# Altium PCB FM_transmitter_rev2.PcbDoc
Units mil, origin at the board's own origin, x right, y up, seen from the top; angles counter-clockwise.
Board outline 2047.24 x 3110.24 mil, 2 copper layers (Top Layer, Bottom Layer); 45 components, 26 nets, 135 pads, 118 vias.
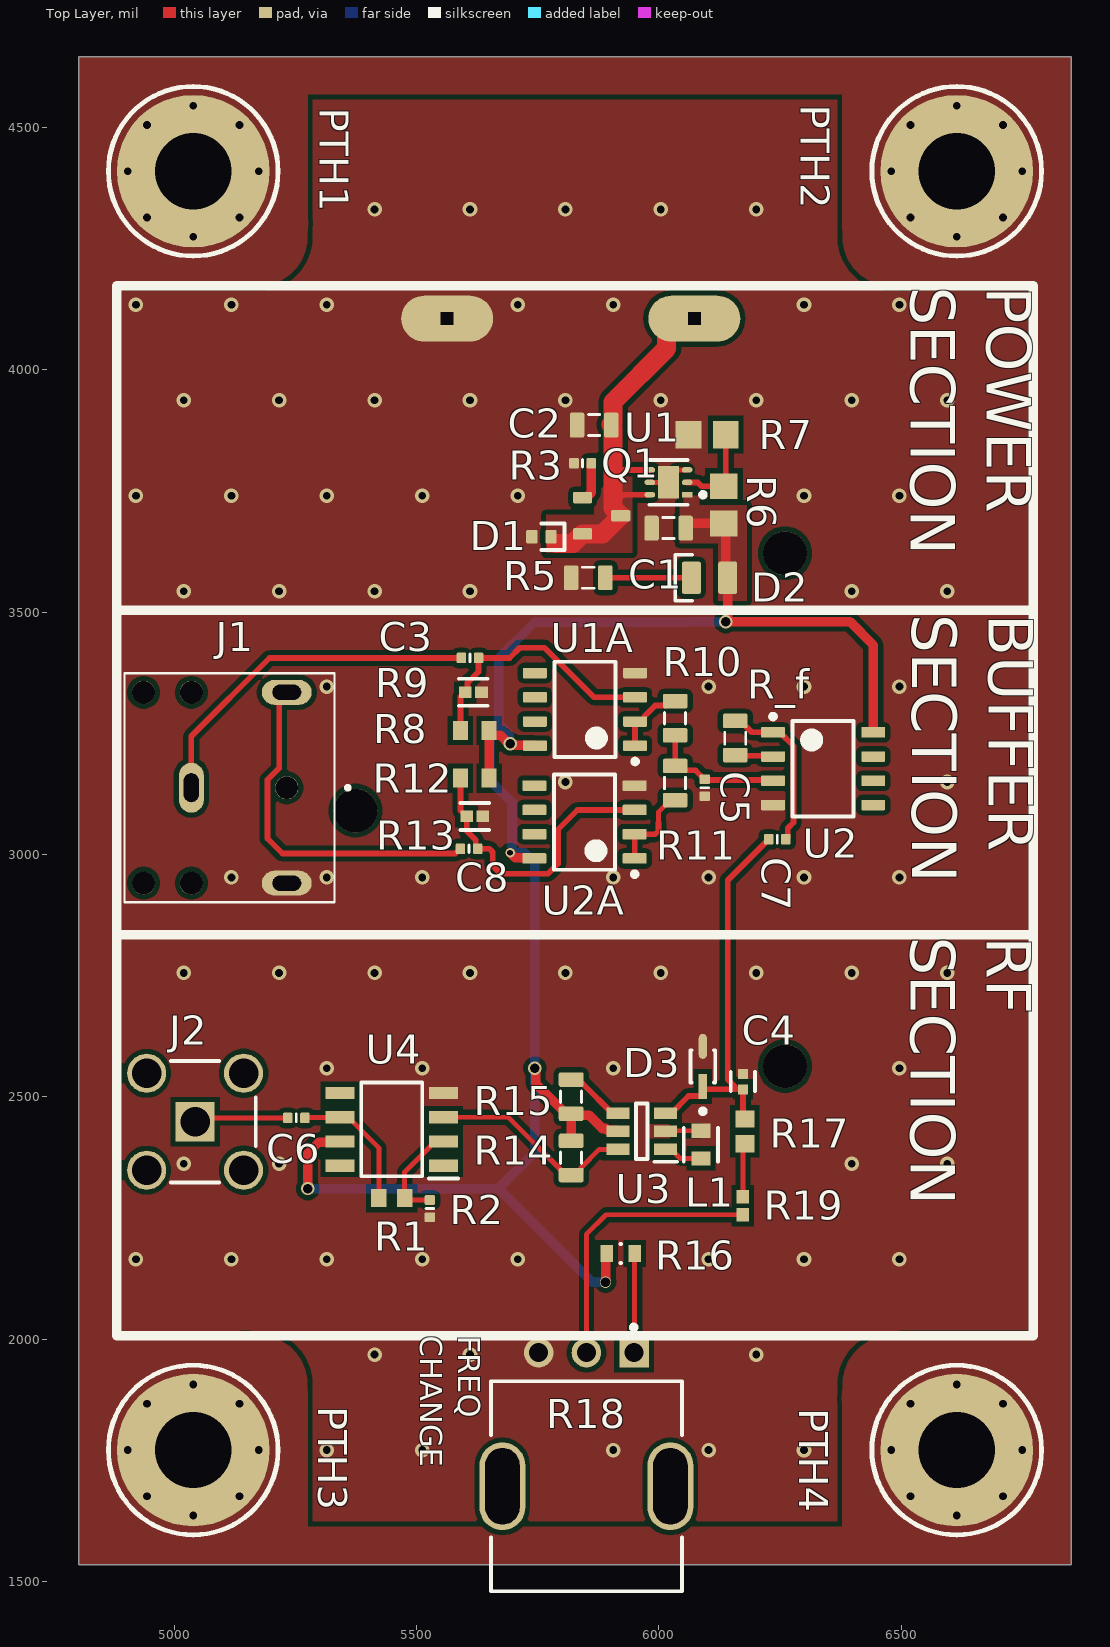
[diagram p0: Top Layer view]
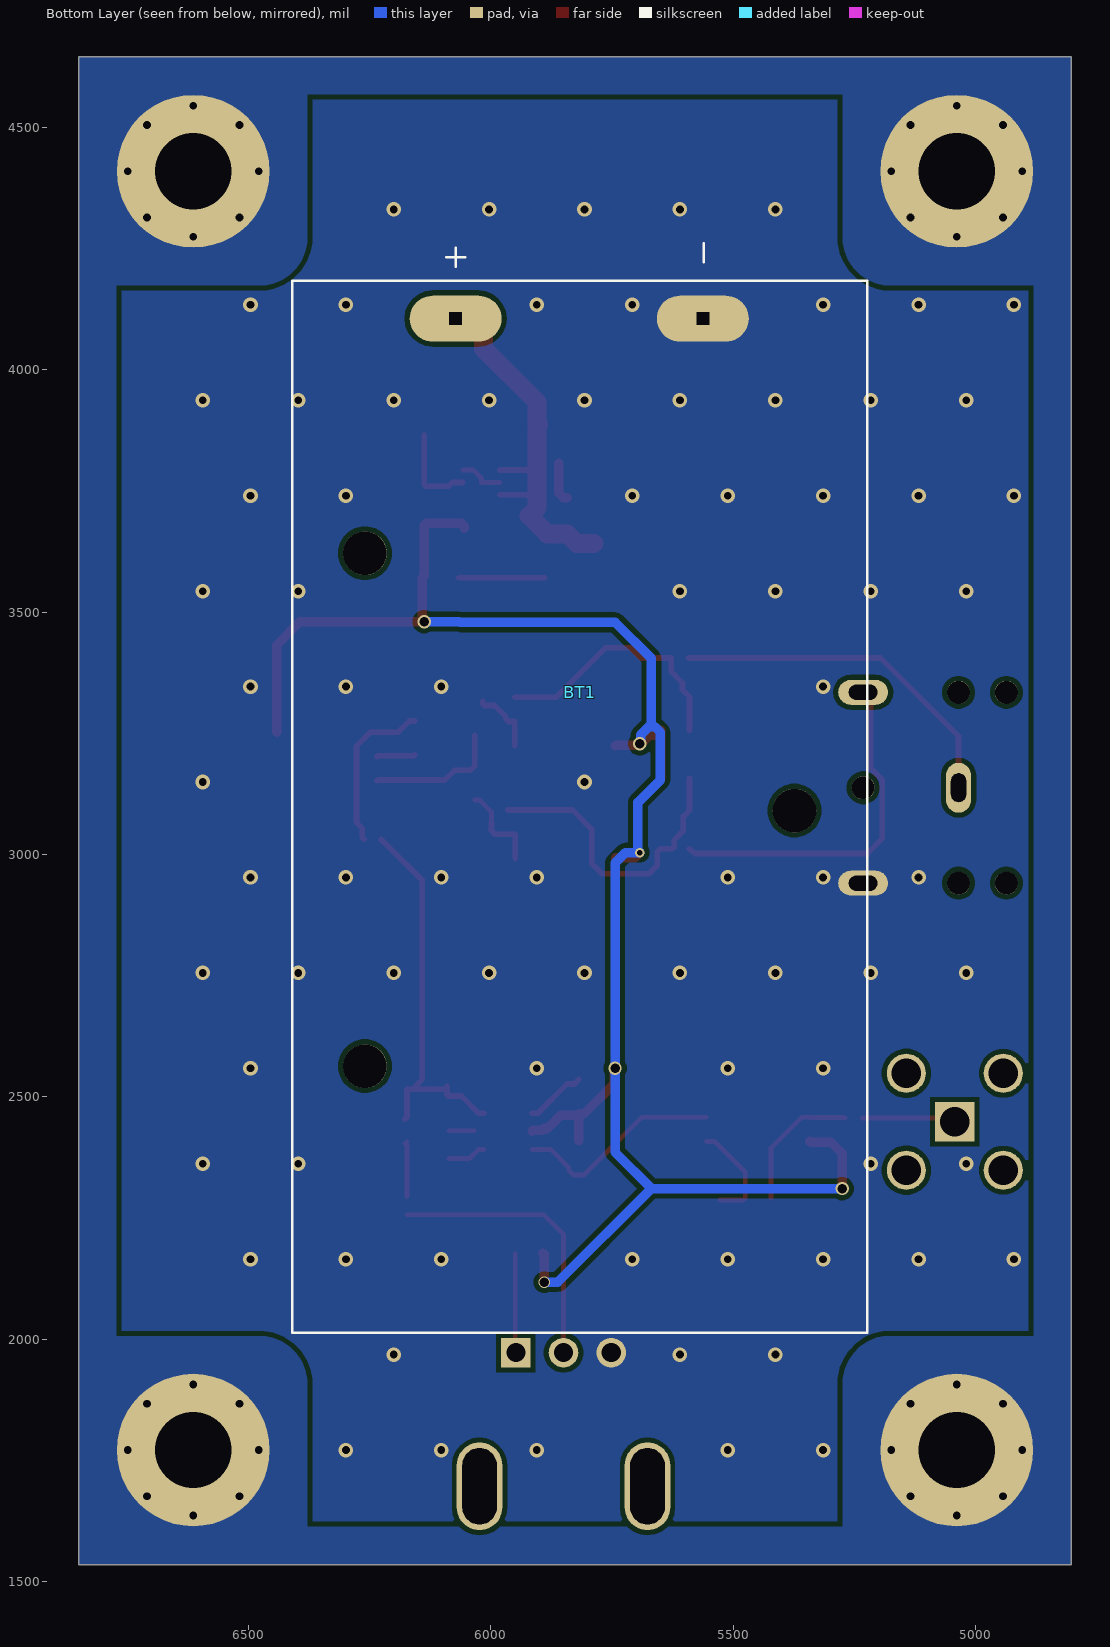
[diagram p1: Bottom Layer view, seen from below]
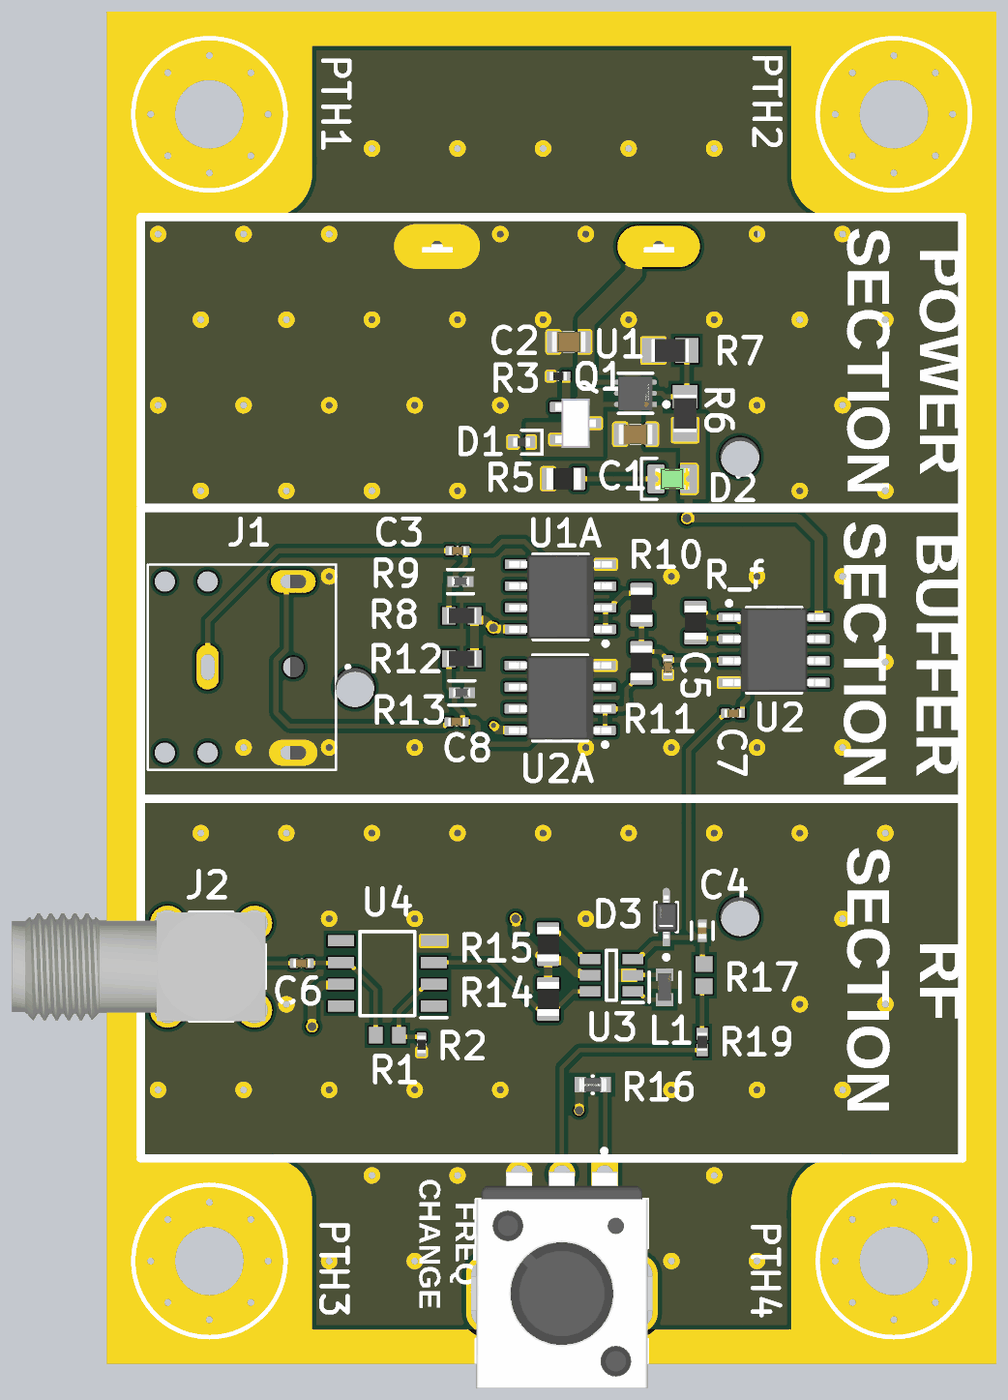
[diagram p2: 3D render of the assembled board from above, using the file's embedded part models]

## Layer stack, top to bottom
Top Solder: solder mask 0.4, Solder Resist, Dk 3.5
Top Layer: signal copper 1.4
Dielectric 1: dielectric 12.6, FR-4, Dk 4.8
Bottom Layer: signal copper 1.4
Bottom Solder: solder mask 0.4, Solder Resist, Dk 3.5

## Board outline
4803.15,1535.43 6850.39,1535.43 6850.39,4645.67 4803.15,4645.67

## Design rules (kind name [scope] priority, off if disabled: settings)
Clearance [All] p1: gap=10 ignorepadtopadclearanceinfootprint=FALSE ismatrix=TRUE
HoleSize MaxMinHoleSize_1 [All] p1: absolutevalues=TRUE maxlimit=100 minlimit=1 maxpercent=80.000 minpercent=20.000
HoleSize [All] p2: absolutevalues=TRUE maxlimit=100 minlimit=1 maxpercent=80.000 minpercent=20.000
PlaneConnect PowerPlaneConnectStyle_1 [All] p1: planeconnectstyle=Relief reliefexpansion=20 reliefentries=2 reliefconductorwidth=10 reliefairgap=10
PlaneConnect [All] p2: planeconnectstyle=Relief reliefexpansion=20 reliefentries=4 reliefconductorwidth=10 reliefairgap=10
PolygonConnect PolygonConnectStyle_1 [All] p1: connectstyle=Direct reliefconductorwidth=10 reliefentries=2 polygonreliefangle="45 Angle" airgapwidth=10
PolygonConnect [All] p2: connectstyle=Relief reliefconductorwidth=10 reliefentries=4 polygonreliefangle="90 Angle" airgapwidth=10
RoutingVias RoutingViaStyle_1 [All] p1: holewidth=10 width=11.81 viastyle="Through Hole" minholewidth=3.94 minwidth=3.94 maxholewidth=236.22 maxwidth=236.22
RoutingVias [All] p2: holewidth=28 width=50 viastyle="Through Hole" minholewidth=28 minwidth=50 maxholewidth=28 maxwidth=50
ShortCircuit ShortCircuit_1 [All] p1: allowed=FALSE
ShortCircuit [All] p2: allowed=FALSE
SolderMaskExpansion [All] p1: expansion=4 istentingtop=FALSE
Width MaxMinWidth_1 [All] p1: maxlimit=196.85 minlimit=10 preferedwidth=11.81 minimp=50.000000 maximp=50.000000 favimp=50.000000
Width [All] p2: maxlimit=10 minlimit=10 preferedwidth=10
27 further rules are at their usual default settings.

## Components (designator, comment, footprint, x,y, rotation, side; value= is the part's Value field where it differs from the comment)
BT1 "BC9VPC" BAT_BC9VPC 5818.02,3090.55 r90 bottom
C1 "Capacitor 100µF +/-20% 6.3V 0805" CAPC0805(2012)145_L 6019.68,3673.23 r180 top value=2u2
C2 "Capacitor 100µF +/-20% 6.3V 0805" CAPC0805(2012)145_L 5866.14,3885.83 r180 top value=2u2
C3 "Capacitor 2,2µF +/-20% 10V 0402" CAPC0402(1005)60_L 5610.24,3405.51 r0 top value=2.2µF
C4 "750pF" FP-C0402-BB-MFG 6173.23,2531.5 r90 top value="750 pF"
C5 "Capacitor 22nF +/-20% 10V 0402" CAPC0402(1005)60_L 6094.49,3137.8 r270 top value=22nF
C6 "Capacitor 2,2µF +/-20% 10V 0402" CAPC0402(1005)60_L 5251.97,2456.69 r180 top value=2.2µF
C7 "Capacitor 2,2µF +/-20% 10V 0402" CAPC0402(1005)60_L 6244.09,3031.5 r180 top value=2.2µF
C8 "Capacitor 2,2µF +/-20% 10V 0402" CAPC0402(1005)60_L 5608.27,3011.81 r0 top value=2.2µF
D1 "D_TVS_0402" D_0402 5757.68,3655.47 r0 top
D2 "GREEN" LED_0805_GREEN 6104.33,3570.87 r0 top
D3 "BZT52C2V4S-7-F" FP-SOD323-IPC_B 6090.55,2562.99 r90 top
J1 "SJ1-3523N" CUI_SJ1-3523N 5035.43,3137.8 r270 top
J2 "731000114" MOLX-731000114_V 5043.31,2448.82 r0 top
L1 "400nH" FP-LQW18CA_00-MFG 6086.61,2401.57 r90 top
PTH1 "Mounting Hole M4" "Mounting Hole M4" 5039.37,4409.45 r0 top
PTH2 "Mounting Hole M4" "Mounting Hole M4" 6614.17,4409.45 r0 top
PTH3 "Mounting Hole M4" "Mounting Hole M4" 5039.37,1771.65 r0 top
PTH4 "Mounting Hole M4" "Mounting Hole M4" 6614.17,1771.65 r0 top
Q1 "SSM3J338R,LF" SSM3J338R,LF-SOT23-F 5881.89,3698.82 r270 top
R1 "910R" RESC1608X55X30NL15T15 5448.82,2291.34 r180 top
R2 "100R2F" RESC0402(1005)_L 5527.56,2269.69 r90 top value=100R
R3 "10KR2F" RESC0402(1005)_L 5842.52,3807.09 r180 top value=10k
R5 "1KR5J" RESC0805(2012)_L 5854.33,3570.87 r0 top value=1k
R6 "Resistor 1k +/-1% 0805 125 mW" RESC2013X70X40ML20T20 6133.86,3721.46 r270 top
R7 "Resistor 1k +/-1% 0805 125 mW" RESC2013X70X40ML20T20 6099.41,3866.14 r0 top value=160k
R8 "Resistor 100k +/-1% 0603 100 mW" RESC1608X55X25ML10T15 5620.08,3255.91 r0 top value=100k
R9 "ERA-2AEB473X" FP-ERA2A-IPC_B 5617.18,3334.65 r180 top value=47k
R10 "1KR5J" RESC0805(2012)_L 6033.46,3281.1 r270 top value=1k
R11 "1KR5J" RESC0805(2012)_L 6033.46,3147.64 r90 top value=1k
R12 "Resistor 100k +/-1% 0603 100 mW" RESC1608X55X25ML10T15 5620.08,3157.48 r0 top value=100k
R13 "ERA-2AEB473X" FP-ERA2A-IPC_B 5620.08,3078.74 r180 top value=47k
R14 "1KR5J" RESC0805(2012)_L 5818.9,2374.41 r90 top value=1k
R15 "1KR5J" RESC0805(2012)_L 5818.9,2500.39 r270 top value=1k
R16 "14.7k" FP-ERA3A-MFG 5921.26,2177.17 r0 top value=14.7kΩ
R17 "2.7k" RESC1608X55X30NL20T20 6177.17,2429.13 r90 top
R18 "PTV09A-4225F-B103" FP-PTV09A-4-MFG 5850.39,1696.85 r180 top
R19 "Resistor 0R 0402 63 mW" RESC1005X40X25ML05T10 6173.23,2275.59 r90 top value=0
R_f "1KR5J" RESC0805(2012)_L 6157.48,3240.16 r270 top value=1k
U1 "TLV76701DRVR" FP-DRV0006A-IPC_C 6019.68,3767.72 r180 top
U1A "LM358DR" D0008A_L 5847.44,3299.41 r180 top
U2 "LM358DR" D0008A_L 6338.58,3177.17 r0 top
U2A "LM358DR" D0008A_L 5846.46,3066.93 r180 top
U3 "MAX2606EUT+T" SOT95P280X145-6N 5964.57,2429.13 r180 top
U4 "LMH6714MA_NOPB" SOIC127P600X175-8N 5448.82,2433.07 r180 top

## Footprints (in the part's own frame and the unit in brackets; to place one, negate y for a bottom-side part, rotate by r counter-clockwise, add the part's x,y. Pads: shape width x height; smd on the part's side, far side on the other; paste and mask are expansions set on the pad)
BAT_BC9VPC [mil]
  oval 94.88x189.76 hole 26 square: N(1015,-255) P(1015,255)
  round 90 hole 90 unplated: ""(-527,442) ""(0,-444) ""(531,442)
  silkscreen extent -1077,-594 1171,592, body extent -1085,-593 1085,593, height 845
CAPC0402(1005)60_L [mm] "Chip Capacitor, Body 1.0x0.5mm, Height 0.6mm, IPC High Density"
  rrect25% 0.5x0.55 smd: 1(-0.45,0) 2(0.45,0)
  silkscreen extent 0,-0.2 0,0.2, body extent -0.5,-0.25 0.5,0.25, height 0.6
CAPC0805(2012)145_L [mm] "Chip Capacitor, Body 2.0x1.2mm, Height 1.45mm, IPC High Density"
  rrect25% 0.76x1.3 smd: 1(-0.9,0) 2(0.89,0)
  silkscreen extent -0.3,-0.55 0.3,0.55, body extent -1,-0.6 1,0.6, height 1.45
CUI_SJ1-3523N [mm]
  oval 2.616x1.308 hole 0.8 slot 1.5 at 0 deg: 1(0,0)
  oval 1.308x2.616 hole 0.8 slot 1.5 at 90 deg: 2(5,5) 3(-5,5)
  round 1.2 hole 1.2 unplated: ""(-5,0) ""(-5,-2.5) ""(0,5) ""(5,0) ""(5,-2.5)
  silkscreen extent -6,-3.5 6,8.3
D0008A_L [mm] "SOIC, 8-Leads, Body 5x4mm, Pitch 1.27mm, IPC High Density"
  rrect18% 1.25x0.55 smd: 1(-2.625,1.905) 2(-2.625,0.635) 3(-2.625,-0.635) 4(-2.625,-1.905) 5(2.625,-1.905) 6(2.625,-0.635) 7(2.625,0.635) 8(2.625,1.905)
  silkscreen extent -2.75,-2.5 1.6,2.85, body extent -3,-2.45 3,2.45, height 1.63
D_0402 [mm]
  rrect25% 0.6x0.7 smd: A(-0.5,0) K(0.5,0)
  silkscreen extent 0,-0.7 1.2,0.7, body extent -0.5,-0.25 0.5,0.25, height 0.51
FP-C0402-BB-MFG [mm]
  rect 0.52x0.52 smd paste+0 mask+0: 1(-0.4,0) 2(0.4,0)
  silkscreen extent -0.5,-0.64 0.5,0.64, body extent -0.8,-0.4 0.8,0.4, height 0.25
FP-DRV0006A-IPC_C [mm]
  rect 0.556x0.292 smd paste+0 mask+0: 1(-0.978,0.65)
  rrect100% 0.556x0.292 smd paste+0 mask+0: 2(-0.978,0) 3(-0.978,-0.65) 4(0.978,-0.65) 5(0.978,0) 6(0.978,0.65)
  rect 1.1x1.7 smd paste-1000 mask+0: 7(0,0)
  silkscreen extent -1.93,-1.17 1,1.17, body extent -1.36,-1.1 1.36,1.1, height 0.25
FP-ERA2A-IPC_B [mil]
  rect 25.97x24.25 smd paste+0 mask+0: 1(-16.78,0) 2(16.78,0)
  silkscreen extent -30,-28 30,28, body extent -36,-18 36,18, height 10
FP-ERA3A-MFG [mm]
  rect 0.65x0.9 smd paste+0 mask+0: 1(-0.725,0) 2(0.725,0)
  silkscreen extent -0.03,-0.5 0.03,0.5, body extent -1.15,-0.6 1.15,0.6, height 0.25
FP-LQW18CA_00-MFG [mm]
  rect 0.75x1 smd paste+0 mask+0: 1(-0.725,0) 2(0.725,0)
  silkscreen extent -0.87,-0.9 0.87,0.9, body extent -1.2,-0.6 1.2,0.6, height 0.25
FP-PTV09A-4-MFG [mm]
  rect 1.55x1.55 hole 1 paste-2539.97 mask+0: 1(-2.5,-7)
  round 1.55 hole 1 paste-2539.97 mask+0: 2(0,-7) 3(2.5,-7)
  rrect100% 2.4x4.6 hole 4 slot 1.8 at 0 deg paste-2539.97 mask+0: 4(-4.4,0) 5(4.4,0)
  silkscreen extent -5,-8.45 5,5.5, body extent -5.8,-7.88 5.8,5.6, height 0.25
FP-SOD323-IPC_B [mil]
  rect 51.4x17.03 smd paste+0 mask+0: 1(-41.35,0)
  rrect100% 51.4x17.03 smd paste+0 mask+0: 2(41.35,0)
  silkscreen extent -97,-26 33,26, body extent -77,-35 77,35, height 10
LED_0805_GREEN [mm]
  rrect25% 1x1.7 smd: A(0.95,0) K(-0.95,0)
  silkscreen extent -1.8,-1.2 -0.9,1.2, body extent -1,-0.63 1,0.63, height 1.12
MOLX-731000114_V [mm] "Connector, 5-Leads, Body 14.8x6.35mm, Pitch 2.54mm"
  rect 2.05x2.05 hole 1.54: 1(0,0)
  round 2.05 hole 1.54: 2(-2.54,2.54) 3(-2.54,-2.54) 4(2.54,-2.54) 5(2.54,2.54)
  silkscreen extent -1.26,-3.17 3.17,3.17, body extent -11.62,-3.17 3.18,3.18, height 9.57
"Mounting Hole M4" [mm]
  round 8 hole 4: 3(0,0)
  silkscreen extent -4.44,-4.44 4.44,4.44
RESC0402(1005)_L [mm] "Chip Resistor, Body 1.0x0.5mm, IPC High Density"
  rrect25% 0.5x0.55 smd: 1(-0.45,0) 2(0.45,0)
  silkscreen extent 0,-0.2 0,0.2, body extent -0.5,-0.25 0.5,0.25, height 0.3
RESC0805(2012)_L [mm] "Chip Resistor, Body 2.0x1.3mm, IPC High Density"
  rrect25% 0.76x1.3 smd: 1(-0.9,0) 2(0.89,0)
  silkscreen extent -0.3,-0.55 0.3,0.55, body extent -1,-0.62 1,0.63, height 0.6
RESC1005X40X25ML05T10 [mm] "Chip Resistor, 2-Leads, Body 1.05x0.55mm, IPC Low Density"
  rect 0.7x0.65 smd: 1(-0.475,0) 2(0.475,0)
  body extent -0.53,-0.28 0.53,0.28, height 0.4
RESC1608X55X25ML10T15 [mm] "Chip Resistor, 2-Leads, Body 1.70x0.90mm, IPC Low Density"
  rect 0.8x1 smd: 1(-0.75,0) 2(0.75,0)
  body extent -0.85,-0.45 0.85,0.45, height 0.55
RESC1608X55X30NL15T15 [mm] "Chip Resistor, 2-Leads, Body 1.60x0.80mm, IPC Medium Density"
  rect 0.8x0.95 smd: 1(-0.675,0) 2(0.675,0)
  body extent -0.87,-0.48 0.87,0.48, height 0.55
RESC1608X55X30NL20T20 [mm] "Chip Resistor, 2-Leads, Body 1.60x0.80mm, IPC Medium Density"
  rect 0.9x1 smd: 1(-0.65,0) 2(0.65,0)
  body extent -0.9,-0.5 0.9,0.5, height 0.55
RESC2013X70X40ML20T20 [mm] "Chip Resistor, 2-Leads, Body 2.2x1.35mm, IPC Low Density"
  rect 1.35x1.45 smd: 1(-0.975,0) 2(0.975,0)
  body extent -1.1,-0.67 1.1,0.67, height 0.7
SOIC127P600X175-8N [mm]
  rect 1.528x0.65 smd: 1(-2.711,1.905) 2(-2.711,0.635) 3(-2.711,-0.635) 4(-2.711,-1.905) 5(2.711,-1.905) 6(2.711,-0.635) 7(2.711,0.635) 8(2.711,1.905)
  silkscreen extent -3.47,-2.45 1.6,2.58
SOT95P280X145-6N [mm]
  rect 1.2x0.6 smd: 1(-1.25,0.95) 2(-1.25,0) 3(-1.25,-0.95) 4(1.25,-0.95) 5(1.25,0) 6(1.25,0.95)
  silkscreen extent -1.85,-1.45 0.3,1.6
SSM3J338R,LF-SOT23-F [mm]
  rrect25% 0.6x1 smd: D(0,1) G(-0.95,-1) S(0.95,-1)
  body extent -1.45,-1.2 1.45,1.2, height 0.91

## Part data
BT1: library part CMP-00029-00001-1, "Battery Holder 1 Cells 9V Size Plastic Tray", Case/Package=None, Check_prices=https://www.snapeda.com/parts/BC9VPC/Memory+Protection+Devices/view-part/?ref=eda, Component Type=Standard, Design Item ID=BC9VPC, MF="MPD (Memory Protection Devices)", MP=BC9VPC, Pins=2, SnapEDA_Link=https://www.snapeda.com/parts/BC9VPC/Memory+Protection+Devices/view-part/?ref=snap, Source=BC9VPC.SchLib
C1 C2: library part CMP-001-00054-4, "Chip Capacitor, 100µF +/-20%, 6.3V, 0805, Thickness 1.45 mm", Case/Package=0805, Max Operating Temperature=85°C, Min Operating Temperature=-55°C, Tolerance=10%, Voltage Rating=6.3V, Mounting Technology=SMT, Pins=2
C3 C6 C7 C8: library part CMP-001-00056-4, "Chip Capacitor, 2,2µF +/-20%, 10V, 0402, Thickness 0.6 mm", Case/Package=0402, Max Operating Temperature=85°C, Min Operating Temperature=-55°C, Tolerance=10%, Voltage Rating=10V, Mounting Technology=SMT, Pins=2
C4: library part CMP-1034-01571-3, "CAP CER 750PF 50V NP0 0402", Capacitance="750 pF", Manufacturer=Kemet, Manufacturer Part Number=C0402C751J5GACTU, Package=C0402-BB, Temperature="-55°C to +125°C", Temperature Characteristic=C0G, Temperature Coefficient=15%, Temperature Range High=+125°C, Temperature Range Low=-55°C, Tolerance=0.05, Voltage Rating="50 V", Automotive=No, Category=Cap, ComponentLink2Description=Datasheet, ComponentLink2URL=https://content.kemet.com/datasheets/KEM_C1002_X7R_SMD.pdf, Device Class L1="Passive Components", Device Class L2=Capacitors, Device Class L3="Ceramic Capacitors", Digikey Description="CAP CER 750PF 50V NP0 0402", Height=0.55mm, Ipc Land Pattern Name=CAPC10050X50, Lead Free=Yes, Material=Ceramic, Mouser Description="Multilayer Ceramic Capacitor, C Series, 750 Pf, - 5%, C0g / Np0, 50 V, 0402 [1005 Metric] Rohs Compliant: Yes", Octopart=https://octopart.com/c0402c751j5gactu-kemet-19049839, RoHS=TRUE
C5: library part CMP-001-00062-3, "Chip Capacitor, 22nF +/-20%, 10V, 0402, Thickness 0.6 mm", Case/Package=0402, Max Operating Temperature=85°C, Min Operating Temperature=-55°C, Tolerance=10%, Voltage Rating=10V, Mounting Technology=SMT, Pins=2
D1: "Diode TVS / ESD 0402"
D2: library part LED_0805_GREEN, "LED 0805 GREEN SMD"
D3: library part CMP-12792-000028-1, "DIODE ZENER 2.4V 200MW SOD323", Max Operating Temperature=150°C, Max Power Dissipation=200mW, Max Reverse Leakage Current=50uA, Min Operating Temperature=-65°C, Output Current=50mA, Package Quantity=3000, Test Current=5mA, Tolerance=8%, Voltage Rating (DC)=2.4V, Contact Plating=Tin, Element Configuration=Single, ESD Protection=No, Height=1mm, Impedance=100R, Lead Free="Lead Free", Length=1.8mm, Mount="Surface Mount", Number of Pins=2, Packaging="Tape and Reel", Peak Reverse Current=50uA, Power Dissipation=200mW, Power Rating=200mW, Radiation Hardening=No, REACH SVHC="No SVHC", Termination=SMD/SMT, Voltage Tolerance=8%, Weight=0.000173oz, Width=1.4mm, Zener Current=5mA, Zener Voltage=2.4V
J1: library part CMP-002-00094-1, "3.5 mm, Stereo, Right Angle, Through Hole, 3 Conductors, 0 Internal Switches, Audio Jack Connector", Case/Package=None, Check_prices=https://www.snapeda.com/parts/SJ1-3523N/CUI+Devices/view-part/?ref=eda, Component Type=Standard, CUI_purchase_URL=https://www.cuidevices.com/product/interconnect/connectors/audio-connectors/jacks/sj1-3523n?utm_source=snapeda.com&utm_medium=referral&utm_campaign=snapedaBOM, Design Item ID=SJ1-3523N, MF="CUI Devices", MP=SJ1-3523N, Pins=3, SnapEDA_Link=https://www.snapeda.com/parts/SJ1-3523N/CUI+Devices/view-part/?ref=snap, Source=SJ1-3523N.SchLib
J2: library part CMP-2000-05487-1, "SMA Right-Angle PCB Jack Receptacle, Brass Body, Gold Plated, 50 Ohm, 5-Pin THD, RoHS, Tray", Manufacturer=Molex, Package Description="5-Pin Through Hole Device, Body 14.8 x 6.35 mm, Pitch 2.54 mm", Datasheet URL=http://www.molex.com/webdocs/datasheets/pdf/en-us/0731000114_RF_COAX_CONNECTORS.pdf, Datasheet Version=09/2016, Manufacturer URL=http://www.molex.com/, Mounting Technology=ThroughHole, Package Reference=731000114, Package URL=http://www.molex.com/pdm_docs/sd/731000114_sd.pdf
L1: library part CMP-06042-011085-1, "Wire Wound Ferrite type RF Inductor 400nH ±5% 680mA 0.26Ω 0603 (1608)"
PTH1 PTH2 PTH3 PTH4: library part CMP-00004-1, "M4 size screw hole"
Q1: "MOSFET P-Channel Vds=12V Id=6A", Manufacturer Part Number=Toshiba, Manufacturer=SSM3J338R,LF
R1: library part CMP-2000-00683-1, Manufacturer=Panasonic, Part Number=ERJ-3EKF9100V
R2: library part CMP-009-00065-2, "100R 0.063W 1% 0402 (1005 Metric)  SMD", Case/Package=0402, Power=63mW, Tolerance=1%, Mounting Technology=SMT, Pins=2
R3: library part CMP-009-00066-2, "10K 0.063W 1% 0402 (1005 Metric)  SMD", Case/Package=0402, Power=63mW, Tolerance=1%, Mounting Technology=SMT, Pins=2
R5 R10 R11 R14 R15 R_f: library part CMP-009-00076-2, "1K 0.125W 5% 0805 (2012 Metric)  SMD", Case/Package=0805, Power=125mW, Tolerance=5%, Mounting Technology=SMT, Pins=2
R6 R7: library part CMP-009-00010-5, "Chip Resistor, 1 KOhm, +/- 1%, 0.125 W, -55 to 155 degC, 0805 (2013 Metric)", Case/Package=0805, Max Operating Temperature=155°C, Min Operating Temperature=-55°C, Power=125mW, Tolerance=1%, Voltage Rating=150V, Mounting Technology=SM, Pins=2, RoHS Compliant=True
  R6: 840K=835k
R8 R12: library part CMP-009-00023-5, "Chip Resistor, 100 KOhm, +/- 1%, 0.1 W, -55 to 155 degC, 0603 (1608 Metric)", Case/Package=0603, Max Operating Temperature=155°C, Min Operating Temperature=-55°C, Power=100mW, Tolerance=1%, Voltage Rating=50V, Mounting Technology=SM, Pins=2, RoHS Compliant=True
R9 R13: library part CMP-009-00193-1, "Fixed Resistor, Thin Film, 0.063W, 47000ohm, 50V, 0.1% +/-Tol, 25ppm/Cel, Surface Mount, 0402", Case/Package=0402, Max Operating Temperature=155°C, Min Operating Temperature=-55°C, Power=63mW, Tolerance=0.1%, Mounting Technology="Surface Mount", Pins=2, RoHS Compliant=Yes
R16: library part CMP-2000-00913-2, "RES SMD 14.7KOHM 0.1% 1/10W 0603", Manufacturer="Panasonic Electronic Components", Manufacturer Part Number=ERA-3AEB1472V, Package=ERA3A, Power Rating=0.1W, Resistance=14.7kΩ, Temperature="-55°C to +155°C", Temperature Coefficient=25ppm/°C, Temperature Range High=+155°C, Temperature Range Low=-55°C, Tolerance=0.1%, Voltage Rating=75V, Automotive=Yes, Automotive Grade="Grade 0", Category=Res, ComponentLink2Description=Datasheet, ComponentLink2URL=https://industrial.panasonic.com/cdbs/www-data/pdf/RDM0000/AOA0000C307.pdf, Composition="Metal Film", Device Class L1="Passive Components", Device Class L2=Resistors, Device Class L3="Chip SMD Resistors", Digikey Description="RES SMD 14.7KOHM 0.1% 1/10W 0603", Footprint Url=https://industrial.panasonic.com/cdbs/www-data/pdf/RDM0000/DMM0000COL17.pdf, Height=0.55mm, Lead Free=Yes, Mouser Description="Res Thin Film 1.6 x 0.8 mm 14.7K Ohm 0.1% 0.1W(1/10W) 25ppm/ C Molded SMD Punched Carrier T/R", Octopart=https://octopart.com/era3aeb1472v-panasonic-42876006, RoHS=TRUE, Series=ERA
R17: library part CMP-2000-00012-1, Manufacturer=Panasonic, Part Number=ERA3AEB272V
R18: library part CMP-07234-000052-1, "POT 10K OHM 1/20W CARBON LINEAR", Max Operating Temperature=50°C, Max Power Dissipation=50mW, Min Operating Temperature=-10°C, Package Quantity=100, Resistance=10kR, Resistance Tolerance=20%, Resistor Type=Carbon, Actuator Diameter=0.236inch, Actuator Length=0.984inch, Depth=12.5mm, Height=12.5mm, Hole Diameter=9.1mm, Length=11.4mm, Military Standard=Not, Mount="Through Hole", Number of Gangs=1, Number of Turns=1, Packaging=Bulk, Power Rating=50mW, Radiation Hardening=No, REACH SVHC="No SVHC", RoHS Compliant=Yes, Series="Pro Audio PTV09", Taper=Linear, Technology="CARBON FILM", Termination=PCB, Tolerance=20%, TYPE=Potentiometer
R19: library part CMP-009-00004-5, "Chip Resistor, 0 Ohm, 0.063 W, -55 to 155 degC, 0402 (1005 Metric)", Case/Package=0402, Max Operating Temperature=155°C, Min Operating Temperature=-55°C, Power=63mW, Voltage Rating=50V, Mounting Technology=SM, Pins=2, RoHS Compliant=True
U1: library part CMP-04917-000172-1, "IC REG LINEAR POS ADJ 1A 6WSON"
U1A U2 U2A: library part CMP-014-00024-2, "Dual Operational Amplifier, 3 to 32 V, 0 to 70 degC, 8-Pin SOIC (D), Green (RoHS & no Sb/Br), Tape and Reel", Case/Package=SOIC, Manufacturer="Texas Instruments (TI)", Max Dual Supply Voltage=16V, Max Operating Temperature=70°C, Min Dual Supply Voltage=1.5V, Min Operating Temperature=0°C, Nominal Dual Supply Voltage=12V, Nominal Supply Current=1.2mA, Nominal Voltage Gain=100dB, Output Current=30mA, Package Description="8-Pin Small Outline Integrated Circuit, Body 4.9 x 3.9 mm, Pitch 1.27 mm", Package Quantity=1, Package Reference=D0008A, Package Version="4040047-3/M, 06/2011", Channels=2, Common Mode Rejection Ratio=65dB, Datasheet URL=http://www.ti.com/lit/ds/symlink/lm358.pdf, Datasheet Version="SLOS068T, 04/2015", Manufacturer URL=http://www.ti.com/, Max Supply Voltage=16V, Min Supply Voltage=1.5V, Mounting Technology=SM, Nominal Gain Bandwith Product=700KHz, Nominal Supply Voltage=12V, Package URL=http://www.ti.com/lit/ml/msoi002j/msoi002j.pdf, Packaging=CutTape, Pins=8, RoHS Compliant=True, Slew Rate=0.3V/us, Unity Gain Bandwidth Product=700KHz
U3: "VCO Oscillators 45MHz to 650MHz, Integrated IF VCOs with Differential Output", Manufacturer_Name="Analog Devices", Mouser Part Number=700-MAX2606EUTT, Datasheet Link=https://www.mouser.co.uk/datasheet/2/256/MAX2605-MAX2609-1515582.pdf, Geometry.Height=1.45mm, Manufacturer_Part_Number=MAX2606EUT+T, Mouser Price/Stock=https://www.mouser.co.uk/ProductDetail/Analog-Devices-Maxim-Integrated/MAX2606EUT%2bT?qs=GxOUx7aO6nxQrK5ySdDhWg%3D%3D
U4: "Video op amp,LMH6714MA 250MHz  SO8", Manufacturer_Name="Texas Instruments", Manufacturer_Part_Number=LMH6714MA/NOPB, Mouser Part Number=926-LMH6714MA/NOPB, Datasheet Link=http://www.ti.com/lit/ds/symlink/lmh6714.pdf, Geometry.Height=1.75mm, Mouser Price/Stock=https://www.mouser.co.uk/ProductDetail/Texas-Instruments/LMH6714MA-NOPB?qs=7lkVKPoqpbabNRERuC1FjQ%3D%3D

## Via types
v1: diameter 30, hole 16, Top Layer to Bottom Layer, 112 vias
v2: diameter 27.56, hole 19.68, Top Layer to Bottom Layer, 4 vias
v3: diameter 19.68, hole 11.81, Top Layer to Bottom Layer, 1 vias
v4: diameter 23.62, hole 19.68, Top Layer to Bottom Layer, 1 vias

## Nets (pads, with @x,y where several pads share a name; then routed paths per layer and width w, separated by ;. In a path a pad name is that pad's centre, name@x,y a point inside that pad or via, vN(x,y) a via of type N, cw(c..) or ccw(c..) an arc to the next point about the centre after c; other vN are vias at no path point)
+5: C1.1 D2.A R6.2 R8.2 R12.2 R14.2 R15.2 R16.1 U1.1 U1A.8 U2.8 U2A.8 U3.5 U4.7 | length 4004.9
  Top Layer w19.68: v2(5275.59,2311.02) 5275.59,2383.8 5298.34,2406.55 5340.57,2406.55 U4.7 ; R12.2 R8.2@5649.61,3251.97 ; R8.2 R8.2@5649.61,3251.97 ; v3(5692.91,3003.94) 5703.94,2992.91 5742.13,2992.91 U2A.8 ; v2(5744.09,2559.06) 5745.6,2557.55 5745.6,2528.02 5808.27,2465.35 R15.2 ; U1A.8 5743.11,3225.39 5698,3225.39 5695.04,3228.35 5690.78,3228.35 5673.07,3246.06 5655.51,3246.06 R8.2@5649.61,3251.97 ; R14.2 R15.2 ; v4(5889.76,2118.11) 5890.52,2118.86 5890.52,2174.97 R16.1 ; U3.5 5913.39,2431.1 5893.82,2431.1 5890.04,2434.88 5883.51,2434.88 5856.34,2462.05 5822.2,2462.05 R15.2 ; C1.1 6055.12,3677.95 6060.24,3683.07 R6.2 6137.8,3679.13 6137.8,3574.8 D2.A 6141.73,3485.32 6137.8,3481.38 v2(6137.8,3480.32) 6393.7,3480.32 6441.93,3432.09 U2.8
  Bottom Layer w19.68: v2(5275.59,2311.02) 5669.29,2311.02 ; v2(5692.91,3228.35) 5691.41,3229.85 5691.41,3246.67 5674.29,3263.78 ; v4(5889.76,2118.11) 5862.2,2118.11 5669.29,2311.02 ; v2(6137.8,3480.32) 6065.75,3480.32 6064.68,3479.25 5743.82,3479.25 5669.29,3404.72 5669.29,3268.78 5674.29,3263.78 ; 5669.29,2311.02 5744.09,2385.83 v2(5744.09,2559.06) 5744.09,2982.74 5722.89,3003.94 v3(5692.91,3003.94) 5696.85,3007.87 5696.85,3107.48 5650.59,3153.74 5650.59,3252.25 5662.12,3263.78 5674.29,3263.78
+9: BT1.P C2.1 D1.K Q1.D Q1.S U1.4 U1.6 | length 776.9
  Top Layer w11.81: 5921.26,3793.31 U1.4 ; 5925.2,3740.16 5927.17,3742.13 U1.6
  Top Layer w39.37: 5787.4,3641.73 5822.83,3641.73 Q1.S 5883.86,3661.42 Q1.D 5905.51,3714.57 5905.51,3793.31 5905.51,3881.89 C2.1 5901.57,3887.63 5905.51,3891.57 5905.51,3933.72 6015.68,4043.9 6015.68,4080.4 6036.34,4101.06 BT1.P@6072.84,4101.06
"bias + lsig": C3.2 R8.1 R9.2 U1A.3 | length 539.4
  Top Layer w11.81: R8.1 5590.55,3325.67 5599.53,3334.65 R9.2 5605.07,3339.32 5605.07,3354.08 5627.95,3376.97 C3.2 5692.03,3405.51 5713.06,3426.54 5764.01,3426.54 5866.14,3324.41 U1A.3
"bias + rsig": C8.2 R12.1 R13.2 U2A.3 | length 633.9
  Top Layer w11.81: R12.1 5590.55,3090.62 5602.44,3078.74 R13.2 5603.3,3048.9 5622.05,3030.15 5622.05,3015.75 C8.2 5650.4,3011.81 5657.32,3004.89 5657.32,2976.71 5673.56,2960.47 5771.28,2960.47 5792.07,2981.26 5792.07,3051.91 5832.09,3091.93 U2A.3@5965.39,3091.93
feedback: R6.1 R7.2 U1.2 | length 186.9
  Top Layer w11.81: U1.2 6058.34,3767.57 6079.87,3767.57 6087.6,3759.84 R6.1 6137.8,3763.78 R7.2
GND: BT1.N C1.2 C2.2 C4.2 C5.2 D1.A D3.2 J1.2 L1.2 R2.1 R3.2 R5.1 R7.1 R9.1 R13.1 R18.3 U1.3 U1.5 U1.7 U1A.4 U2.4 U2A.4 U3.2 U4.4 | length 145
  Top Layer w10: U1.5 U1.7 6019.68,3776.65 6036.34,3793.31 U1.3 ; U3.2@6034.45,2430.12 L1.2
  other v1: 5314.96,1771.65 5511.81,1771.65 5905.51,1771.65 6102.36,1771.65 6299.21,1771.65 5413.39,1968.5 5610.24,1968.5 6200.79,1968.5 4921.26,2165.35 5118.11,2165.35 5314.96,2165.35 5511.81,2165.35 5708.66,2165.35 6102.36,2165.35 6299.21,2165.35 6496.06,2165.35 5019.69,2362.2 5216.54,2362.2 6397.64,2362.2 6594.49,2362.2 5314.96,2559.06 5511.81,2559.06 5905.51,2559.06 6496.06,2559.06 5019.69,2755.91 5216.54,2755.91 5413.39,2755.91 5610.24,2755.91 5807.09,2755.91 6003.94,2755.91 6200.79,2755.91 6397.64,2755.91 6594.49,2755.91 5118.11,2952.76 5314.96,2952.76 5511.81,2952.76 5905.51,2952.76 6102.36,2952.76 6299.21,2952.76 6496.06,2952.76 5807.09,3149.61 6594.49,3149.61 5314.96,3346.46 6102.36,3346.46 6299.21,3346.46 6496.06,3346.46 5019.69,3543.31 5216.54,3543.31 5413.39,3543.31 5610.24,3543.31 6397.64,3543.31 6594.49,3543.31 4921.26,3740.16 5118.11,3740.16 5314.96,3740.16 5511.81,3740.16 5708.66,3740.16 6299.21,3740.16 6496.06,3740.16 5019.69,3937.01 5216.54,3937.01 5413.39,3937.01 5610.24,3937.01 5807.09,3937.01 6003.94,3937.01 6200.79,3937.01 6397.64,3937.01 6594.49,3937.01 4921.26,4133.86 5118.11,4133.86 5314.96,4133.86 5708.66,4133.86 5905.51,4133.86 6299.21,4133.86 6496.06,4133.86 5413.39,4330.71 5610.24,4330.71 5807.09,4330.71 6003.94,4330.71 6200.79,4330.71
led_K: D2.K R5.2 | length 177.6
  Top Layer w11.81: R5.2 D2.K
left_in: C3.1 J1.1 | length 730.2
  Top Layer w11.81: J1.1 5035.43,3244.09 5196.85,3405.51 C3.1
MASS: PTH1.3 PTH2.3 PTH3.3 PTH4.3
  other v1: 5039.37,1636.65 6614.17,1636.65 4943.91,1676.19 5134.83,1676.19 6518.71,1676.19 6709.63,1676.19 4904.37,1771.65 5174.37,1771.65 6479.17,1771.65 6749.17,1771.65 4943.91,1867.11 5134.83,1867.11 6518.71,1867.11 6709.63,1867.11 5039.37,1906.65 6614.17,1906.65 5039.37,4274.45 6614.17,4274.45 4943.91,4313.99 5134.83,4313.99 6518.71,4313.99 6709.63,4313.99 4904.37,4409.45 5174.37,4409.45 6479.17,4409.45 6749.17,4409.45 4943.91,4504.91 5134.83,4504.91 6518.71,4504.91 6709.63,4504.91 5039.37,4544.45 6614.17,4544.45
NetC5_1: C5.1 R10.2 R11.2 U2.3 | length 277.8
  Top Layer w11.81: R10.2 R11.2 6042.52,3173.62 6075.39,3173.62 6093.5,3155.51 C5.1 6096.16,3153.84 6233.56,3153.84 U2.3
NetC6_1: C6.1 R1.2 U4.6 | length 283
  Top Layer w10: C6.1 5270.37,2457.38 5341.4,2457.38 U4.6 5359.37,2458.07 5422.24,2395.2 R1.2
NetC6_2: C6.2 J2.1 | length 194.2
  Top Layer w10: J2.1 5051.18,2456.69 C6.2
NetC7_1: C7.1 R_f.1 U2.1 | length 340.3
  Top Layer w11.81: R_f.1 6168.11,3275.59 6191.54,3252.17 U2.1 6249.02,3252.17 6277.56,3223.62 6277.56,3065.95 6265.75,3054.13 6265.75,3035.43 C7.1
NetQ1_G: Q1.G R3.1 | length 82.8
  Top Layer w19.68: Q1.G 5850.39,3736.22 5860.24,3746.06 R3.1
NetR1_1: R1.1 R2.2 U4.2 | length 213.9
  Top Layer w10: R2.2 5479.33,2287.4 R1.1 5475.39,2345.2 5538.27,2408.07 U4.2
NetR10_1: R10.1 U1A.1 U1A.2 | length 139.8
  Top Layer w11.81: U1A.1 U1A.2 5964.57,3274.41 5969.49,3279.33 5969.49,3284.45 5992.52,3307.48 6013.78,3307.48 6017.02,3310.72 R10.1@6017.02,3316.23
NetR11_1: R11.1 U2A.1 U2A.2 | length 185.9
  Top Layer w10: 5998.99,3066.02 5998.99,3087.62 6012.87,3101.5 6012.87,3102.24 6022.83,3112.2 R11.1
  Top Layer w11.81: U2A.1 U2A.2 5992.07,3041.93 5998.99,3048.85 5998.99,3066.02
NetR14_1: R14.1 U3.6 U4.3 | length 434.2
  Top Layer w10: U4.3 5689.17,2458.07 5808.27,2338.98 R14.1 5829.53,2338.98 5839.49,2348.94 5839.49,2354.49 5876.73,2391.73 U3.6
NetR15_1: R15.1 U3.4 | length 125.2
  Top Layer w11.81: R15.1 5827.95,2526.77 5843.31,2526.77 5903.54,2466.54 U3.4
NetR16_2: R16.2 R18.1 | length 205.1
  Top Layer w10: R18.1 5949.8,1973.43 R16.2
NetR17_1: R17.1 R19.2 | length 116.5
  Top Layer w10: R19.2 6173.23,2399.61 R17.1 R17.1@6173.23,2407.48
NetR18_2: R18.2 R19.1 | length 583.6
  Top Layer w10: R18.2 5850.39,2216.54 5890.75,2256.89 R19.1
NetR_f_2: R_f.2 U2.2 | length 79
  Top Layer w11.81: R_f.2 6158.96,3203.64 6233.76,3203.64 U2.2
osc_inductor: L1.1 U3.1 | length 80.6
  Top Layer w10: U3.1 6025.59,2391.73 6044.29,2373.03 L1.1
right_in: C8.1 J1.3 | length 733.3
  Top Layer w11.81: J1.3 5216.54,3318.9 5216.54,3177.95 5192.76,3154.17 5192.76,3032.85 5223.45,3002.15 5579.7,3002.15 5584.43,3006.89 5586.61,3006.89 5590.55,3010.83 C8.1
tune_in: C4.1 C7.2 D3.1 R17.2 U3.3 | length 802.6
  Top Layer w11.81: U3.3 6025.59,2466.54 6060.9,2501.85 6087.94,2501.85 6090.55,2504.45 D3.1@6090.55,2518.36 ; D3.1 D3.1@6090.55,2518.36 ; 6156.4,2515.75 6093.16,2515.75 D3.1@6090.55,2518.36 ; 6156.4,2521.1 6141.73,2535.77 6141.73,2946.85 6221.46,3026.57 6222.44,3026.57 6226.38,3030.51 C7.2 ; 6161.98,2515.75 6167.87,2515.75 C4.1 6173.23,2458.66 R17.2
pads on no net: BT1. J1. J2.2 J2.3 J2.4 J2.5 R18.4 R18.5 U1A.5 U1A.6 U1A.7 U2.5 U2.6 U2.7 U2A.5 U2A.6 U2A.7 U4.1 U4.5 U4.8

## Polygon pours and split planes (outlines as drawn)
GND on Top Layer "GND_L01_P022" (solid, pour order 22): 4803.15,4645.67 4803.15,1535.43 6850.39,1535.43 6850.39,4645.67
+5 on Top Layer "+5_L01_P018" (solid, pour order 18): 6043.31,3740.16 6043.31,3641.73 6122.05,3641.73 6122.05,3523.62 6181.1,3523.62 6181.1,3720.47 6082.68,3720.47 6082.68,3740.16
+9 on Top Layer "+9_L01_P016" (solid, pour order 16): 5905.51,3779.53 5866.14,3740.16 5866.14,3700.79 5767.72,3700.79 5767.72,3622.05 5944.88,3622.05 5944.88,3779.53
MASS on Top Layer "MASS_L01_P005" (solid, pour order 5): 4803.15,1535.43 6850.39,1535.43 6850.39,4645.67 4803.15,4645.67 4803.15,2007.87 4881.89,2007.87 4881.89,4173.23 5175.59,4173.23 ccw(c5175.59,4273.23) 5275.59,4273.23 5275.59,4566.93 6377.95,4566.93 6377.95,4273.23 ccw(c6477.95,4273.23) 6477.95,4173.23 6771.65,4173.23 6771.65,2007.18 6477.95,2007.18 ccw(c6477.95,1907.18) 6377.95,1907.18 6377.95,1614.17 5275.59,1614.17 5275.59,1907.87 ccw(c5175.59,1907.87) 5175.59,2007.87 4803.15,2007.87
MASS on Top Layer "MASS_L01_P002" (solid, pour order 2): 4881.89,4173.23 5157.48,4173.23 ccw(c5146.85,4301.97) 5275.59,4312.6 5275.59,4566.93 4881.89,4566.93
MASS on Top Layer "MASS_L01_P001" (solid, pour order 1): 6377.95,4566.93 6377.95,4291.34 ccw(c6506.69,4301.97) 6517.32,4173.23 6771.65,4173.23 6771.65,4566.93
MASS on Top Layer "MASS_L01_P003" (solid, pour order 3): 5275.59,1614.17 5275.59,1889.76 ccw(c5146.85,1879.13) 5136.22,2007.87 4881.89,2007.87 4881.89,1614.17
MASS on Top Layer "MASS_L01_P004" (solid, pour order 4): 6771.65,2007.87 6496.06,2007.87 ccw(c6506.69,1879.13) 6377.95,1868.5 6377.95,1614.17 6771.65,1614.17
GND on Bottom Layer "GND_L02_P023" (solid, pour order 23): 4808.59,4632.68 4803.15,4627.24 4803.15,1535.43 6850.39,1535.43 6850.39,4645.67 4803.15,4645.67 4803.15,1535.43
MASS on Bottom Layer "MASS_L02_P007" (solid, pour order 7): 4803.15,1535.43 6850.39,1535.43 6850.39,4645.67 4803.15,4645.67 4803.15,2007.87 4881.89,2007.87 4881.89,4173.23 5175.59,4173.23 ccw(c5175.59,4273.23) 5275.59,4273.23 5275.59,4566.93 6377.95,4566.93 6377.95,4273.23 ccw(c6477.95,4273.23) 6477.95,4173.23 6771.65,4173.23 6771.65,2007.18 6477.95,2007.18 ccw(c6477.95,1907.18) 6377.95,1907.18 6377.95,1614.17 5275.59,1614.17 5275.59,1907.87 ccw(c5175.59,1907.87) 5175.59,2007.87 4803.15,2007.87
no net on Top Solder "NONET_L01_P021" (solid, pour order 21): 4803.15,1535.43 6850.39,1535.43 6850.39,4645.67 4803.15,4645.67 4803.15,2007.87 4881.89,2007.87 4881.89,4173.23 5175.59,4173.23 ccw(c5175.59,4273.23) 5275.59,4273.23 5275.59,4566.93 6377.95,4566.93 6377.95,4273.23 ccw(c6477.95,4273.23) 6477.95,4173.23 6771.65,4173.23 6771.65,2007.18 6477.95,2007.18 ccw(c6477.95,1907.18) 6377.95,1907.18 6377.95,1614.17 5275.59,1614.17 5275.59,1907.87 ccw(c5175.59,1907.87) 5175.59,2007.87 4803.15,2007.87
no net on Bottom Solder "NONET_L01_P024" (solid, pour order 24): 4803.15,1524.8 6850.39,1524.8 6850.39,4635.04 4803.15,4635.04 4803.15,1997.24 4881.89,1997.24 4881.89,4162.6 5175.59,4162.6 ccw(c5175.59,4262.6) 5275.59,4262.6 5275.59,4556.3 6377.95,4556.3 6377.95,4262.6 ccw(c6477.95,4262.6) 6477.95,4162.6 6771.65,4162.6 6771.65,1996.55 6477.95,1996.55 ccw(c6477.95,1896.55) 6377.95,1896.55 6377.95,1603.54 5275.59,1603.54 5275.59,1897.24 ccw(c5175.59,1897.24) 5175.59,1997.24 4803.15,1997.24

## Silkscreen, mask and mechanical layers (free items; w line width, h text height)
Top Overlay:
  lines w3.94: 6456.69,4173.23 ccw(c6456.69,4173.23) 6456.69,4173.23
  lines w19.68: 6456.69,3503.94 4881.89,3503.94 ; 4881.89,2834.65 6456.69,2834.65 6771.65,2834.65 ; 4881.89,2834.65 4881.89,2007.87 6771.65,2007.87 6771.65,2834.65 ; 4881.89,2834.65 4881.89,3503.94 ; 4881.89,3503.94 4881.89,4173.23 6456.69,4173.23 6771.65,4173.23 6771.65,3503.94 ; 4881.89,3503.94 6771.65,3503.94 ; 6771.65,2834.65 6771.65,3503.94
  text "POWER / SECTION" at 6488.19,4171.26 h157.48 r270
  text "BUFFER / SECTION" at 6492.05,3496.06 h157.48 r270
  text "RF  / SECTION" at 6488.19,2830.71 h157.48 r270
  text "FREQ / CHANGE" at 5492.13,2007.87 h78.74 r270
Mechanical 1:
  lines w3.94: 4881.89,4566.93 4881.89,1614.17 6771.65,1614.17 6771.65,4566.93 ; 4881.89,4566.93 6771.65,4566.93 ; 4881.89,4566.93 4921.26,4566.93 6771.65,4566.93 ; 4803.15,1535.43 6850.39,1535.43 6850.39,4645.67 4803.15,4645.67 4803.15,1535.43

## Dimensions
6850.39,4645.67 to 6614.17,4409.45 on Mechanical 1
6614.17,4409.45 to 6850.39,4645.67 on Mechanical 1
4803.15,4645.67 to 4803.15,1535.43 on Mechanical 1
4803.15,4645.67 to 6850.39,4645.67 on Mechanical 1

## Text inside footprints (layer, text, board x,y; h text height)
BT1: Mechanical 13 "Refer to datasheet for NPTH countersink dimensions" at 4114.17,34.26 h70 r270
D2: Mechanical 13 "+" at 6173.89,3610.24 h39.37
J1: Mechanical 13 "PCB EDGE" at 4907.48,2862.2 h32 r270